# Altium PCB OMD_60V_REF_BK.PcbDoc (part 2 of 2)
Units mm, origin at the board's own origin, x right, y up, seen from the top; angles counter-clockwise.
Board outline 72 x 71.99 mm, 6 copper layers (Top Layer, L2, L3, L4, L5, Bottom Layer), stack 1.563 mm thick; 142 components, 145 nets, 791 pads, 505 vias.
Unrouted connection lines stored in the file: 199.
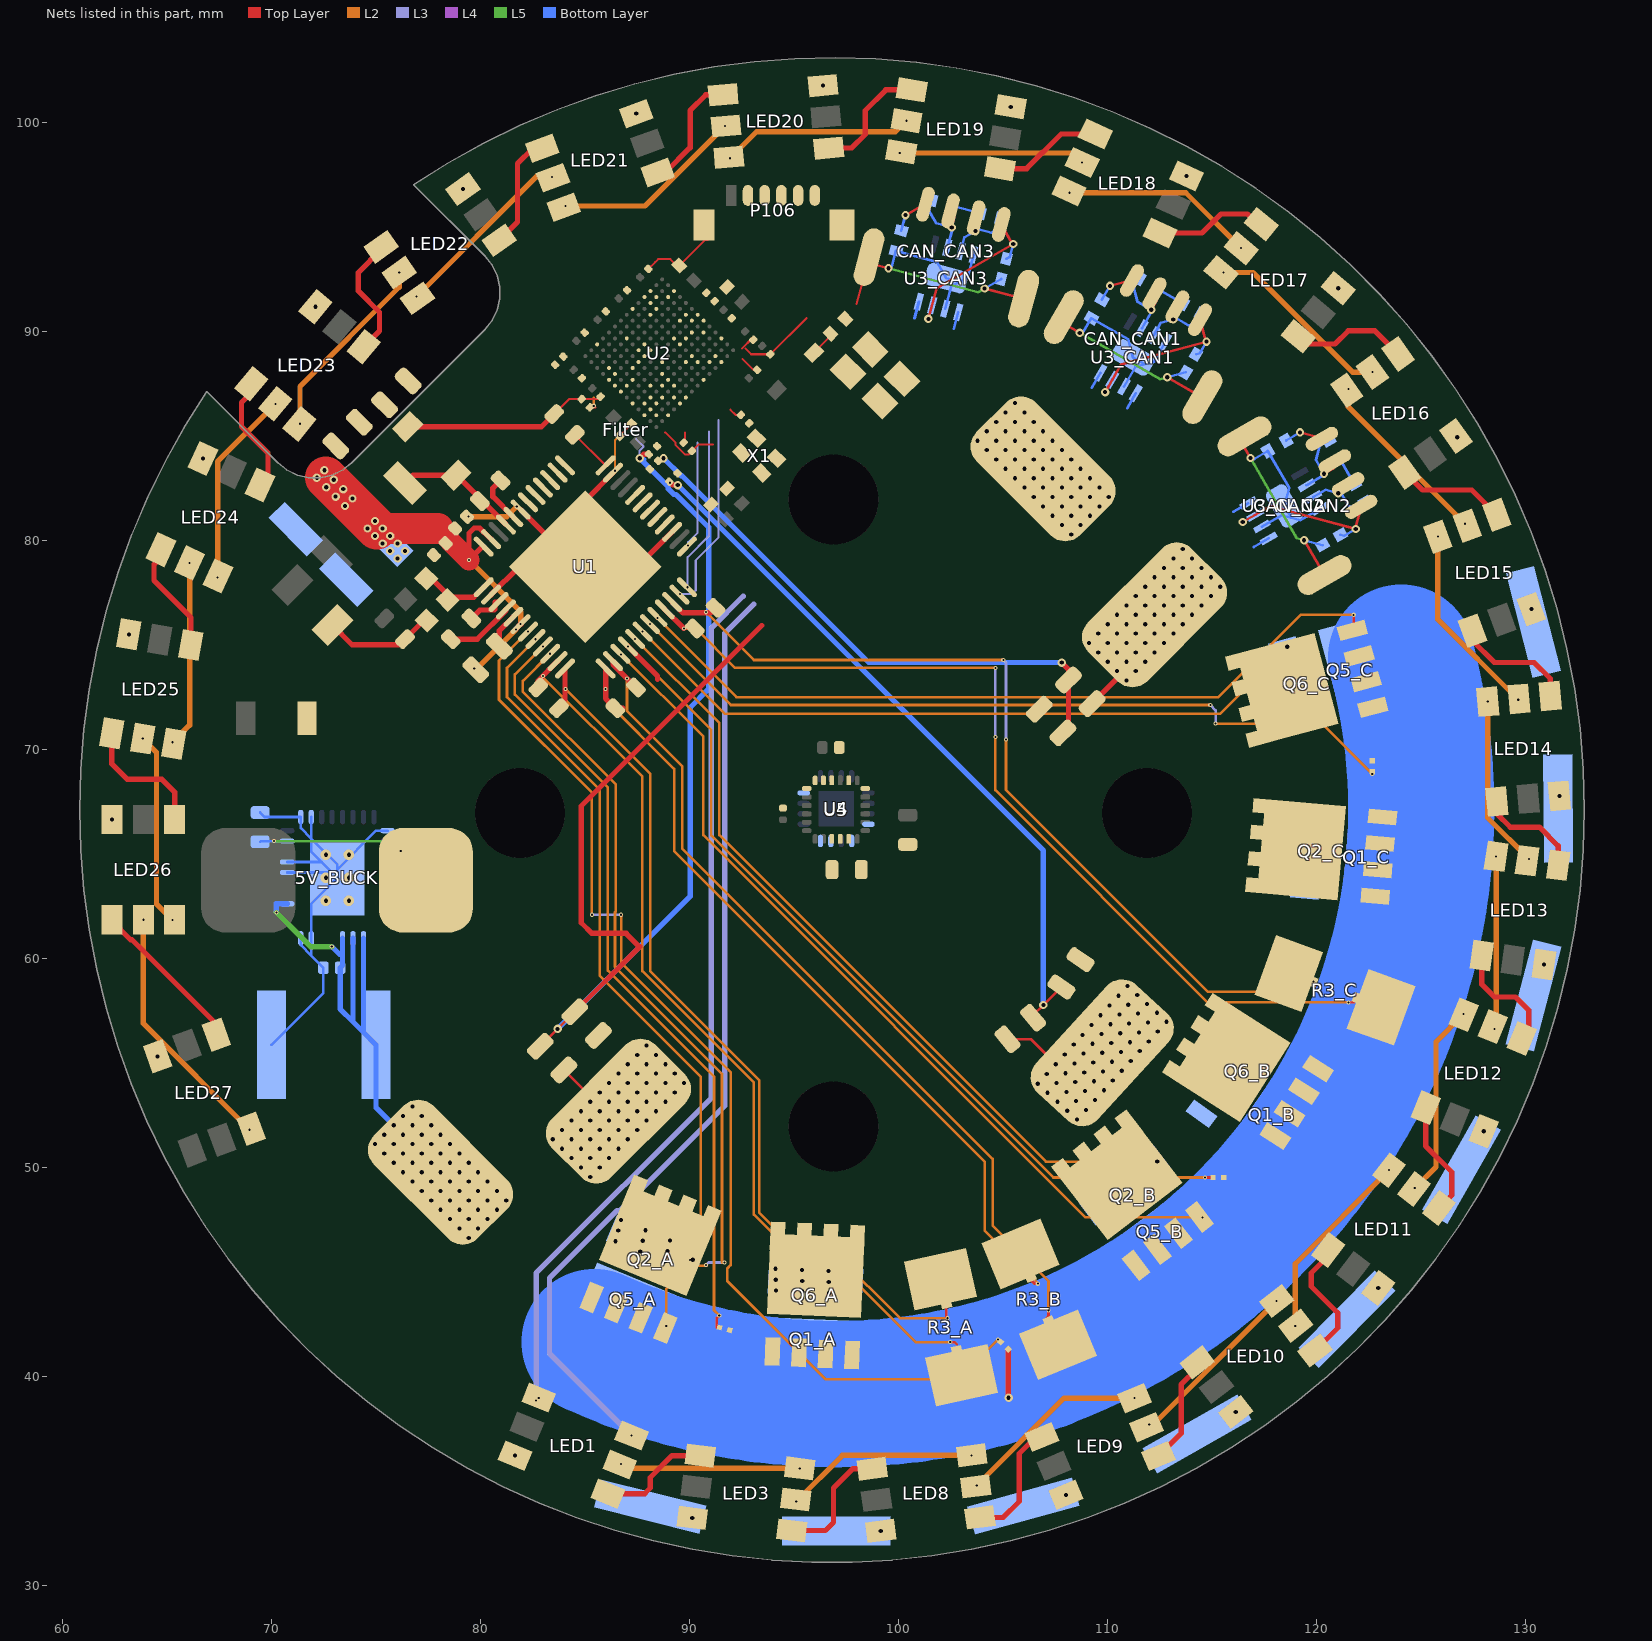
[diagram p6: the nets of this part, all layers, seen from the top]

## Via types
v1: diameter 0.4, hole 0.2, Top Layer to Bottom Layer, 379 vias
v2: diameter 0.2, hole 0.1, Top Layer to L2, 86 vias
v3: diameter 0.2, hole 0.1, L2 to L3, 15 vias
v4: diameter 0.2, hole 0.1, L5 to Bottom Layer, 9 vias
v5: diameter 0.5, hole 0.2, Top Layer to Bottom Layer, 6 vias
v6: diameter 0.2, hole 0.1, Top Layer to L3, 4 vias
v7: diameter 0.2, hole 0.1, L4 to L5, 3 vias
v8: diameter 0.4, hole 0.2, L3 to L4, 3 vias

## Nets (pads, with @x,y where several pads share a name; then routed paths per layer and width w, separated by ;. In a path a pad name is that pad's centre, name@x,y a point inside that pad or via, vN(x,y) a via of type N, cw(c..) or ccw(c..) an arc to the next point about the centre after c; other vN are vias at no path point) (continued)
GND: 5V_BUCK.6 5V_BUCK.7 5V_BUCK.11 5V_BUCK.12 5V_BUCK.19 5V_BUCK.35 5V_BUCK.36 5V_BUCK.37 -.1 C3.2 C5.2 C6.2 C7.P$2 C8.2 C11.1 C12.2 C13.P$2 C14.1 C15.2 C16_CAN1.1 C16_CAN2.1 C16_CAN3.1 C17.2 C18.P$2 C19.2 C20.1 C21.1 C22.1 C23.1 C24.1 C25.1 C26.2 C27.2 C28.2 C29.1 C30.1 C31.1 C32.2 C33.2 C34.2 C35.2 C36.2 C37.2 C38.2 C39.2 C40.1 C41.1 C42.1 C43.2 C44.2 C45_A.2 C45_B.2 C45_C.2 C46.1 C47.1 C48.P$2 CAN_CAN1.GND CAN_CAN2.GND CAN_CAN3.GND D1.2 Filter.2 LED1.4 LED3.4 LED8.4 LED9.4 LED10.4 LED11.4 LED12.4 LED13.4 LED14.4 LED15.4 LED16.4 LED17.4 LED18.4 LED19.4 LED20.4 LED21.4 LED22.4 LED23.4 LED24.4 LED25.4 LED26.4 LED27.4 P106.6 P106.GND R1_CAN1.2 R1_CAN2.2 R1_CAN3.2 R3_A.2 R3_B.2 R3_C.2 R7.1 R10_A.2 R10_B.2 R10_C.2 R18.2 R19.1 U1.2 U1.27 U1.35 U1.43 U1.49 U2.A8 U2.A11 U2.B6 U2.C2 U2.F1 U2.F13 U2.H5 U2.J9 U2.J13 U2.M1 U2.M11 U2.N4 U2.N5 U2.P9 U3_CAN1.2 U3_CAN1.8 U3_CAN2.2 U3_CAN2.8 U3_CAN3.2 U3_CAN3.8 U4.8 U5.11 U5.18 U5.20 X1.2 X1.4 | length 129.1
  Top Layer w0.1: C8.2@83.54,86.06 84.259,86.779 C43.2@84.853,86.779 C32.2@85.645,86.779 ; U1.35@86.356,83.253 v2(86.448,83.346) ; v2(86.674,85.028) Filter.2@87.239,85.594 ; C37.2@88.043,93.002 88.368,93.327 88.513,93.472 89.101,93.472 89.524,93.049 C14.1@89.524,93.158 90.767,94.401 P106.GND@90.871,94.401 ; 88.85,85.18 89.351,84.679 89.351,84.57 89.806,84.115 89.967,84.115 90.459,84.607 91.144,84.607 ; 91.968,86.269 92.219,86.017 C39.2@92.473,86.017 ; 92.533,89.203 C26.2@93.006,89.676 ; 92.558,88.689 93.071,88.176 C28.2@93.25,88.176 ; 92.686,89.203 92.966,88.923 C27.2@93.885,88.923 95.619,90.656 ; 98.014,91.319 CAN_CAN3.GND@98.272,92.282
  Top Layer w0.127: CAN_CAN3.GND@98.602,93.565 98.791,93.237 v1(99.538,93.036) ; v1(104.135,92.068) 105.984,91.572 CAN_CAN3.GND@106.001,91.582 ; CAN_CAN1.GND@107.92,90.698 108.018,90.332 v1(108.688,89.945) ; v1(112.877,87.82) 114.535,86.863 CAN_CAN1.GND@114.554,86.868 ; CAN_CAN2.GND@116.566,84.993 116.468,84.627 v1(116.854,83.957) ; v1(119.42,80.022) 120.377,78.364 CAN_CAN2.GND@120.396,78.359
  Top Layer w0.254: C5.2@72.925,75.974 73.875,75.024 76.135,75.024 77.418,76.307 R7.1@77.571,76.307 ; D1.2@76.528,85.453 82.933,85.453 C8.2@83.54,86.06 ; C7.P$2@79.365,81.149 v2(79.435,81.149) ; U1.2@80.522,77.42 81.848,78.745 U1.49@84.676,78.745 ; U1.43@81.936,81.485 U1.49@84.676,78.745 ; U1.35@86.356,83.253 85.03,81.927 U1.49@85.03,78.745 ; U1.27@89.184,80.425 87.505,78.745 U1.49@85.03,78.745 ; v1(108.031,34.336) LED9.4@108.031,34.349 ; LED16.4@126.686,85.012 v1(126.746,84.953) ; U1.49@84.676,78.745 U1.49@85.03,78.745
  L5 w0.127: v1(99.538,93.036) 103.824,91.888 v1(104.135,92.068) ; v1(108.688,89.945) 112.53,87.727 v1(112.877,87.82) ; v1(116.854,83.957) 119.073,80.115 v1(119.42,80.022)
  L2 w0.1: v2(86.448,83.346) 86.448,84.803 v2(86.674,85.028)
  L2 w0.254: v2(79.435,81.149) 81.27,81.149 v2(81.749,81.628)
  Bottom Layer w0.127: C47.1@69.469,66.994 69.686,66.777 5V_BUCK.11@71.415,66.777 71.415,66.253 71.915,65.753 ; C46.1@70.017,55.88 72.498,58.361 C48.P$2@72.498,59.563 71.915,60.146 ; 5V_BUCK.6@70.765,64.127 72.915,64.127 5V_BUCK.37@72.415,64.627 ; 5V_BUCK.7@70.765,64.627 5V_BUCK.37@72.415,64.627 ; 5V_BUCK.36@71.415,60.977 71.415,60.646 71.915,60.146 ; 5V_BUCK.12@71.915,66.777 71.915,65.753 ; 5V_BUCK.19@75.565,66.127 75.017,66.127 5V_BUCK.37@73.165,64.275 ; v1(99.538,93.036) 99.694,93.126 R1_CAN3.2@99.891,93.862 101.854,93.336 U3_CAN3.2@102.303,92.559 U3_CAN3.2@102.931,92.39 ; U3_CAN3.2@102.249,91.103 102.533,92.161 U3_CAN3.2@102.931,92.39 ; U3_CAN3.8@103.612,93.678 103.329,92.62 U3_CAN3.2@102.931,92.39 ; v1(104.135,92.068) C16_CAN3.1@104.923,92.522 ; v1(108.688,89.945) 108.861,89.992 R1_CAN1.2@109.242,90.652 111.002,89.636 U3_CAN1.2@111.234,88.768 U3_CAN1.2@111.797,88.443 ; U3_CAN1.2@110.806,87.376 111.353,88.324 U3_CAN1.2@111.797,88.443 ; U3_CAN1.8@112.789,89.511 112.241,88.562 U3_CAN1.2@111.797,88.443 ; v1(112.877,87.82) C16_CAN1.1@113.756,88.055 ; v1(116.854,83.957) 117.028,83.911 R1_CAN2.2@117.688,84.292 118.704,82.532 U3_CAN2.2@118.471,81.665 U3_CAN2.2@118.796,81.102 ; U3_CAN2.2@117.404,80.673 118.352,81.221 U3_CAN2.2@118.796,81.102 ; v1(119.42,80.022) C16_CAN2.1@120.298,79.786 ; U3_CAN2.8@120.189,81.53 119.24,80.983 U3_CAN2.2@118.796,81.102 ; 71.915,60.146 5V_BUCK.35@71.915,60.977 71.915,62.627 5V_BUCK.37@73.165,63.877 5V_BUCK.37@73.165,64.275 ; 71.915,65.753 73.165,64.503 5V_BUCK.37@73.165,64.275 ; 71.915,65.753 71.915,65.127 5V_BUCK.37@72.415,64.627
  Bottom Layer w0.254: v1(108.031,34.336) C21.1@108.077,34.29
  other v1: 99.162,32.62 90.148,33.245 81.666,36.224 116.15,38.315 122.966,44.247 128.014,51.741 64.564,55.327 130.893,59.721 62.381,66.662 131.636,67.792 63.19,75.517 130.295,76.728 108.281,80.296 107.832,80.745 108.73,80.745 107.383,81.194 108.281,81.194 109.179,81.194 106.934,81.643 107.832,81.643 108.73,81.643 109.628,81.643 106.485,82.092 107.383,82.092 108.281,82.092 109.179,82.092 110.077,82.092 106.036,82.541 106.934,82.541 107.832,82.541 108.73,82.541 109.628,82.541 105.587,82.99 106.485,82.99 107.383,82.99 108.281,82.99 109.179,82.99 105.138,83.439 106.036,83.439 107.832,83.439 108.73,83.439 104.689,83.888 105.587,83.888 106.485,83.888 107.383,83.888 108.281,83.888 66.744,83.929 104.24,84.337 105.138,84.337 106.036,84.337 106.934,84.337 107.832,84.337 103.791,84.786 104.689,84.786 105.587,84.786 106.485,84.786 107.383,84.786 104.24,85.235 105.138,85.235 106.036,85.235 106.934,85.235 104.689,85.684 105.587,85.684 106.485,85.684 105.138,86.133 106.036,86.133 105.587,86.582 72.115,91.196 121.057,92.08 79.183,96.825 113.79,97.451 87.467,100.434 105.381,100.757 96.403,101.775
  other v5: 72.615,62.777 73.715,62.777 72.615,63.877 73.715,63.877 72.615,64.977 73.715,64.977
I_A: U1.25 U2.M13 | length 5.2
  Top Layer w0.1: U1.25@89.891,79.718 v6(89.952,79.778)
  L3 w0.1: v6(89.952,79.778) 89.952,79.927 90.401,80.376 90.401,84.686
I_B: U1.24 U2.J11 | length 7.9
  Top Layer w0.1: U1.24@89.891,77.773 v6(89.922,77.773)
  L3 w0.1: v6(89.922,77.773) 89.922,79.21 90.94,80.227 90.94,85.219
I_C: U1.23 U2.J10 | length 9.5
  Top Layer w0.1: U1.23@89.538,77.42 v6(89.562,77.444)
  L3 w0.1: v6(89.562,77.444) 90.132,77.444 90.311,77.623 90.311,79.06 91.398,80.147 91.398,85.779
MCU_BATT_IN: 5V_BUCK.3 5V_BUCK.30 5V_BUCK.31 5V_BUCK.32 +.1 C6.1 C7.P$1 C10.2 C12.1 C13.P$1 C20.2 C21.2 C22.2 C23.2 C24.2 C25.2 C29.2 C30.2 C31.2 C46.2 C48.P$1 NT1.2 Q1_A.D Q1_B.D Q1_C.D Q5_A.D Q5_B.D Q5_C.D R16.2 U1.6 U1.47 U1.48 | length 110.1
  Top Layer w0.127: 72.432,83.008 73.027,82.413
  Top Layer w0.254: v1@72.351,83.025 72.605,83.025 ; C13.P$1@78.574,79.966 C13.P$1@78.574,79.977 ; U1.48@80.169,79.718 80.104,79.718 v2(79.463,79.077) 79.463,80.358 79.717,80.612 79.971,80.612 80.512,80.071 U1.47@80.522,80.071 ; v2(81.717,75.754) 81.717,75.786 v2(81.936,76.005) ; NT1.2@105.271,41.307 105.271,39.001 v1(105.283,38.989)
  Top Layer w1: 77.968,80.583 C13.P$1@78.574,79.977 ; C13.P$1@78.574,79.966 v2(79.463,79.077)
  Top Layer w1.5: 75.047,80.583 77.968,80.583
  Top Layer w2: 72.605,83.025 75.047,80.583
  L5 w0.254: v4(70.247,62.214) 71.882,60.579 v4(72.898,60.579)
  L2 w0.254: v2@79.463,79.088 81.936,76.615 v2(81.936,76.005) ; v2(79.717,73.881) 79.844,73.881 v2(81.717,75.754)
  Bottom Layer w0.254: v4(70.247,62.214) 70.247,62.627 5V_BUCK.3@70.765,62.627 ; v4(72.898,60.579) 73.279,60.198 73.415,60.198 ; 5V_BUCK.32@73.415,60.977 73.415,60.198 ; 5V_BUCK.31@73.915,60.977 73.915,56.982 ; 5V_BUCK.30@74.415,60.977 C46.2@74.415,56.482 ; v1(76.309,51.58) 75.017,52.872 C46.2@75.017,55.88 C46.2@74.415,56.482 ; 73.415,60.198 73.415,59.68 C48.P$1@73.298,59.563 73.298,57.599 73.915,56.982 ; 73.915,56.982 C46.2@74.415,56.482
  Bottom Layer w7: Q5_A.D@85.472,41.663 ccw(c97.028,67.167) Q5_C.D@124.074,74.414
  other v1: 79.452,46.641 79.003,47.09 79.901,47.09 78.554,47.539 79.452,47.539 80.35,47.539 78.105,47.988 79.003,47.988 79.901,47.988 80.799,47.988 77.656,48.437 78.554,48.437 79.452,48.437 80.35,48.437 81.248,48.437 77.207,48.886 78.105,48.886 79.003,48.886 79.901,48.886 80.799,48.886 76.758,49.335 77.656,49.335 78.554,49.335 79.452,49.335 80.35,49.335 76.309,49.784 77.207,49.784 79.003,49.784 79.901,49.784 75.86,50.233 76.758,50.233 77.656,50.233 78.554,50.233 79.452,50.233 75.411,50.682 76.309,50.682 77.207,50.682 78.105,50.682 79.003,50.682 74.962,51.131 75.86,51.131 76.758,51.131 77.656,51.131 78.554,51.131 75.411,51.58 77.207,51.58 78.105,51.58 75.86,52.029 76.758,52.029 77.656,52.029 76.309,52.478 77.207,52.478 76.758,52.927 76.047,79.147 75.688,79.506 76.407,79.506 75.329,79.865 76.047,79.865 74.97,80.224 75.688,80.224 74.611,80.583 75.329,80.583 74.97,80.943 73.533,81.661 73.892,82.02 73.084,82.11 73.443,82.469 72.635,82.559 72.994,82.918 72.186,83.008 72.545,83.367
Net5V_BUCK_9: 5V_BUCK.9 5V_BUCK.21 C47.2 | length 8.2
  L5 w0.127: v4(70.133,65.627) 75.724,65.627 v4(76.2,65.151)
  Bottom Layer w0.127: C47.2@69.469,65.594 69.502,65.627 v4(70.133,65.627) 5V_BUCK.9@70.765,65.627 ; 5V_BUCK.21@75.565,65.127 76.176,65.127 v4(76.2,65.151)
Net5V_BUCK_24: 5V_BUCK.24 5V_BUCK.25 5V_BUCK.26 C2.P$2 L2.1 | length 3.2
  Bottom Layer w0.127: 5V_BUCK.26@75.565,62.627 76.324,62.627 C2.P$2@76.581,62.884 76.338,63.127 ; 5V_BUCK.25@75.565,63.127 76.338,63.127 ; 5V_BUCK.24@75.565,63.627 75.838,63.627 76.338,63.127
Net5V_BUCK_27: 5V_BUCK.27 C2.P$1 | length 1
  Bottom Layer w0.127: 5V_BUCK.27@75.565,62.127 76.538,62.127 C2.P$1@76.581,62.084
NetA_1: A.1 NT2_A.2 Q1_A.S Q2_A.D Q5_A.S Q6_A.D R9_A.2 | length 2
  Top Layer w0.127: R9_A.2@84.005,54.679 85.267,53.417 v1(85.267,53.154)
  other v1: 96.684,44.007 95.415,44.063 94.147,44.118 96.675,44.531 95.406,44.586 94.138,44.642 96.666,45.054 95.398,45.11 94.129,45.165 88.828,45.509 87.654,45.995 88.955,46.017 86.481,46.481 87.781,46.503 89.082,46.525 86.608,46.989 87.908,47.011 86.735,47.497 85.267,49.562 84.818,50.011 85.716,50.011 84.369,50.46 85.267,50.46 86.165,50.46 83.92,50.909 84.818,50.909 85.716,50.909 86.614,50.909 83.471,51.358 84.369,51.358 85.267,51.358 86.165,51.358 87.063,51.358 83.92,51.807 84.818,51.807 85.716,51.807 86.614,51.807 87.512,51.807 84.369,52.256 85.267,52.256 86.165,52.256 87.063,52.256 87.961,52.256 84.818,52.705 85.716,52.705 87.512,52.705 88.41,52.705 86.165,53.154 87.063,53.154 87.961,53.154 88.859,53.154 85.716,53.603 86.614,53.603 87.512,53.603 88.41,53.603 89.308,53.603 86.165,54.052 87.063,54.052 87.961,54.052 88.859,54.052 89.757,54.052 86.614,54.501 87.512,54.501 88.41,54.501 89.308,54.501 87.063,54.95 87.961,54.95 88.859,54.95 87.512,55.399 88.41,55.399 87.961,55.848
NetB_1: B.1 NT2_B.2 Q1_B.S Q2_B.D Q5_B.S Q6_B.D R9_B.2 | length 2.8
  Top Layer w0.127: R9_B.2@105.232,56.146 106.345,56.146 v1(107.539,54.952)
  other v1: 108.554,52.299 108.085,52.728 108.983,52.768 107.617,53.157 108.514,53.197 109.412,53.236 107.149,53.586 108.046,53.626 108.943,53.665 109.841,53.704 106.681,54.015 107.578,54.055 108.475,54.094 109.372,54.133 110.27,54.172 107.11,54.484 108.007,54.523 108.904,54.562 109.801,54.601 110.699,54.64 108.436,54.991 109.333,55.03 110.23,55.069 111.128,55.108 107.968,55.42 108.865,55.459 110.659,55.537 111.557,55.577 108.397,55.888 109.294,55.927 110.191,55.966 111.088,56.006 111.986,56.045 108.826,56.356 109.723,56.395 110.62,56.435 111.517,56.474 112.415,56.513 109.255,56.824 110.152,56.864 111.049,56.903 111.946,56.942 112.844,56.981 109.684,57.293 110.581,57.332 111.478,57.371 112.375,57.41 110.113,57.761 111.01,57.8 111.907,57.839 110.542,58.229 111.439,58.268 110.971,58.697
NetC1_A_1: C1_A.1 R3_A.S1 U1.11 | length 44.5
  Top Layer w0.127: C1_A.1@82.778,72.979 83,73.2 v2(83,73.533) ; v2(102.489,41.656) 102.695,41.656 102.804,41.547
  Top Layer w0.254: C1_A.1@82.778,72.979 82.778,73.312 U1.11@83.704,74.238
  L2 w0.127: v2(83,73.533) 83,73.464 87.757,68.707 87.757,59.414 93.091,54.08 93.091,47.752 95.25,45.593 96.901,45.593 100.838,41.656 v2(102.489,41.656)
NetC1_A_2: C1_A.2 R3_A.S2 U1.12 | length 42.2
  Top Layer w0.127: R3_A.S2@102.296,43.522 102.296,42.865 v2(102.362,42.799)
  Top Layer w0.254: 84.058,72.39 U1.12@84.058,73.884
  L2 w0.127: v2(84.074,72.898) 88.138,68.834 88.138,59.392 93.345,54.185 93.345,47.857 95.355,45.847 97.028,45.847 100.076,42.799 v2(102.362,42.799)
NetC1_B_1: C1_B.1 R3_B.S1 U1.14 | length 40.7
  Top Layer w0.127: R3_B.S1@107.109,42.829 107.188,42.907 v2(107.188,43.18)
  Top Layer w0.254: U1.14@86.356,74.238 86.356,74.075 v2(87.024,73.406) C1_B.1@87.451,72.979 C1_B.1@87.477,72.979
  L2 w0.127: v2(87.024,73.406) 87.024,71.853 89.662,69.215 89.662,65.278 104.521,50.419 104.521,47.244 107.188,44.577 v2(107.188,43.18)
NetC1_B_2: C1_B.2 R3_B.S2 U1.13 | length 39.8
  Top Layer w0.127: R3_B.S2@106.387,44.572 106.509,44.45 v2(106.68,44.45)
  Top Layer w0.254: U1.13@86.002,73.884 v2(86.002,72.898) 86.002,72.448 C1_B.2@86.461,71.989 C1_B.2@86.816,71.989
  L2 w0.127: v2(86.002,72.898) 86.002,72.367 89.281,69.088 89.281,65.151 104.14,50.292 104.14,46.99 v2(106.68,44.45)
NetC1_C_1: C1_C.1 R3_C.S1 U1.21 | length 44.5
  Top Layer w0.127: v2(121.539,57.912) 121.82,57.912 R3_C.S1@122.009,58.101
  Top Layer w0.254: U1.21@88.831,76.712 v2(89.744,75.799)
  L2 w0.127: v2(89.744,75.799) 90.317,75.799 92.202,73.914 v3(104.648,73.914) ; v3(104.648,70.612) 104.648,68.072 114.808,57.912 v2(121.539,57.912)
  L3 w0.127: v3(104.648,70.612) v3(104.648,73.914)
NetC1_C_2: C1_C.2 R3_C.S2 U1.22 | length 42.8
  Top Layer w0.127: R3_C.S2@119.801,58.905 v2(119.865,58.905)
  Top Layer w0.254: U1.22@89.184,77.066 89.702,76.548 91.02,76.548 C1_C.2@91.261,76.789
  L2 w0.127: v2(90.805,76.581) 93.091,74.295 v3(105.029,74.295) ; v3(105.156,70.485) 105.156,68.072 114.808,58.42 119.38,58.42 v2(119.865,58.905)
  L3 w0.127: v3(105.029,74.295) 105.156,74.168 v3(105.156,70.485)
NetC4_1: C4.1 D1.1 L1.2 U1.45 | length 6
  Top Layer w0.254: L1.2@76.405,82.761 76.782,83.137 D1.1@78.843,83.137 78.87,83.137 U1.45@81.229,80.778
NetC4_2: C4.2 U1.44 | length 2.3
  Top Layer w0.254: C4.2@80.974,82.885 80.606,82.517 80.606,82.108 U1.44@81.583,81.132
NetC8_1: C8.1 U1.36 | length 2.1
  Top Layer w0.1: C8.1@84.53,85.07 85.994,83.607 U1.36@86.002,83.607 U1.36@86.035,83.64
NetC9_1: C9.1 U1.3 | length 1.8
  Top Layer w0.254: C9.1@79.577,76.281 79.983,76.687 80.668,76.687 80.705,76.724 80.705,77.063 80.707,77.066 U1.3@80.876,77.066
NetC9_2: C9.2 U1.4 | length 3.3
  Top Layer w0.254: C9.2@78.587,75.291 79.857,75.291 81.229,76.663 U1.4@81.229,76.712
NetC10_1: C10.1 U1.5 | length 1.7
  Top Layer w0.254: C10.1@80.918,74.955 80.918,75.694 U1.5@81.583,76.359
NetC16_CAN1_2: C16_CAN1.2 CAN_CAN1.1 U3_CAN1.3 | length 8.4
  Top Layer w0.127: v1(109.901,87.11) 110.663,88.429 v1(114.751,89.525) 114.715,89.545 CAN_CAN1.1@114.44,90.571
  Bottom Layer w0.127: v1(109.901,87.11) U3_CAN1.3@110.243,87.701 ; C16_CAN1.2@114.256,88.921 114.429,88.968 v1(114.751,89.525)
NetC16_CAN2_2: C16_CAN2.2 CAN_CAN2.1 U3_CAN2.3 | length 8.4
  Top Layer w0.127: v1(116.488,80.895) 117.807,81.657 v1(121.895,80.561) 121.874,80.597 CAN_CAN2.1@122.149,81.623
  Bottom Layer w0.127: v1(116.488,80.895) U3_CAN2.3@117.079,81.236 ; C16_CAN2.2@121.164,80.286 121.338,80.24 v1(121.895,80.561)
NetC16_CAN3_2: C16_CAN3.2 CAN_CAN3.1 U3_CAN3.3 | length 8.4
  Top Layer w0.127: v1(101.445,90.611) 101.839,92.083 v1(105.503,94.199) 105.464,94.21 CAN_CAN3.1@104.933,95.13
  Bottom Layer w0.127: v1(101.445,90.611) U3_CAN3.3@101.621,91.271 ; C16_CAN3.2@105.181,93.488 105.337,93.578 v1(105.503,94.199)
NetC17_1: C17.1 U5.10
NetC39_1: C39.1 U2.K12 X1.3
NetC40_2: C40.2 U2.K13 X1.1 | length 0.4
  Top Layer w0.1: C40.2@89.806,84.747 89.806,85.179
NetC43_1: C43.1 U2.P5 | length 0.7
  Top Layer w0.1: C43.1@85.249,86.383 85.503,86.383 v2(85.432,86.454)
  L2 w0.1: v2(85.432,86.454) 85.432,86.844
NetC44_1: C44.1 U2.C1
NetC_1: C.1 NT2_C.2 Q1_C.S Q2_C.D Q5_C.S Q6_C.D R9_C.2 | length 2
  Top Layer w0.254: R9_C.2@109.278,72.205 110.472,73.4 v1(110.472,73.76)
  other v1: 110.921,73.311 111.37,73.76 110.023,74.209 110.921,74.209 111.819,74.209 109.574,74.658 110.472,74.658 111.37,74.658 112.268,74.658 109.125,75.107 110.023,75.107 110.921,75.107 111.819,75.107 112.717,75.107 109.574,75.556 110.472,75.556 111.37,75.556 112.268,75.556 113.166,75.556 110.023,76.005 110.921,76.005 111.819,76.005 112.717,76.005 113.615,76.005 110.472,76.454 111.37,76.454 113.166,76.454 114.064,76.454 110.921,76.903 111.819,76.903 112.717,76.903 113.615,76.903 114.513,76.903 111.37,77.352 112.268,77.352 113.166,77.352 114.064,77.352 114.962,77.352 111.819,77.801 112.717,77.801 113.615,77.801 114.513,77.801 115.411,77.801 112.268,78.25 113.166,78.25 114.064,78.25 114.962,78.25 112.717,78.699 113.615,78.699 114.513,78.699 113.166,79.148 114.064,79.148 113.615,79.597
NetCAN_CAN1_2: CAN_CAN1.2 R15_CAN1.2 U3_CAN1.7 | length 3
  Bottom Layer w0.127: U3_CAN1.7@112.226,89.836 112.567,90.427 v1(113.164,90.587) 113.338,90.634 113.888,90.316 114.235,90.409 R15_CAN1.2@114.489,90.849
NetCAN_CAN1_3: CAN_CAN1.3 JMP_CAN1.1 U3_CAN1.6 | length 3.9
  Top Layer w0.127: v1(112.111,91.049) 112.36,91.479 CAN_CAN1.3@112.267,91.826
  Bottom Layer w0.127: JMP_CAN1.1@111.526,92.559 111.268,92.113 111.451,91.43 v1(112.111,91.049) 112.131,90.972 U3_CAN1.6@111.663,90.161
NetCAN_CAN1_4: CAN_CAN1.4 R1_CAN1.1 | length 1.9
  Top Layer w0.127: v1(110.131,92.192) 111.157,92.466 CAN_CAN1.4@111.189,92.448
  Bottom Layer w0.127: R1_CAN1.1@109.746,91.525 v1(110.131,92.192)
NetCAN_CAN2_2: CAN_CAN2.2 R15_CAN2.2 U3_CAN2.7 | length 3
  Bottom Layer w0.127: U3_CAN2.7@119.864,82.093 120.455,82.435 v1(121.052,82.275) 121.226,82.228 121.543,81.678 121.89,81.585 R15_CAN2.2@122.33,81.839
NetCAN_CAN2_3: CAN_CAN2.3 JMP_CAN2.1 U3_CAN2.6 | length 3.9
  Top Layer w0.127: v1(120.371,83.201) 120.801,83.45 CAN_CAN2.3@120.894,83.796
  Bottom Layer w0.127: U3_CAN2.6@119.539,82.656 120.35,83.125 v1(120.371,83.201) 119.99,83.861 120.173,84.544 JMP_CAN2.1@120.619,84.802
NetCAN_CAN2_4: CAN_CAN2.4 R1_CAN2.1 | length 1.9
  Top Layer w0.127: v1(119.228,85.181) 120.253,84.906 CAN_CAN2.4@120.272,84.874
  Bottom Layer w0.127: R1_CAN2.1@118.561,84.796 v1(119.228,85.181)
NetCAN_CAN3_2: CAN_CAN3.2 R15_CAN3.2 U3_CAN3.7 | length 3
  Bottom Layer w0.127: U3_CAN3.7@102.984,93.846 103.161,94.506 v1(103.696,94.815) 103.852,94.905 104.465,94.74 104.776,94.92 R15_CAN3.2@104.908,95.411
NetCAN_CAN3_3: CAN_CAN3.3 JMP_CAN3.1 U3_CAN3.6 | length 3.9
  Top Layer w0.127: CAN_CAN3.3@102.508,95.779 102.688,95.468 v1(102.559,94.988)
  Bottom Layer w0.127: JMP_CAN3.1@101.603,96.296 101.47,95.798 101.823,95.185 v1(102.559,94.988) 102.599,94.919 U3_CAN3.6@102.356,94.014
NetCAN_CAN3_4: CAN_CAN3.4 R1_CAN3.1 | length 1.9
  Top Layer w0.127: v1(100.351,95.58) 101.271,96.111 CAN_CAN3.4@101.306,96.101
  Bottom Layer w0.127: R1_CAN3.1@100.152,94.836 v1(100.351,95.58)
NetD2_C: D2.C R20.2 | length 1.2
  Top Layer w0.1: D2.C@95.968,88.989 96.757,89.778 R20.2@96.757,89.905
NetJMP_CAN1_2: JMP_CAN1.2 R15_CAN1.1 | length 1.4
  Bottom Layer w0.127: JMP_CAN1.2@112.399,92.055 R15_CAN1.1@113.616,91.353
NetJMP_CAN2_2: JMP_CAN2.2 R15_CAN2.1 | length 1.4
  Bottom Layer w0.127: JMP_CAN2.2@121.123,83.929 R15_CAN2.1@121.826,82.712
NetJMP_CAN3_2: JMP_CAN3.2 R15_CAN3.1 | length 1.4
  Bottom Layer w0.127: JMP_CAN3.2@102.577,96.035 R15_CAN3.1@103.934,95.671
NetLED1_1: LED1.1 LED3.6 | length 5.5
  Top Layer w0.254: LED1.1@86.108,34.406 87.873,34.406 88.138,34.671 88.138,35.179 89.18,36.221 LED3.6@90.527,36.221
NetLED1_2: LED1.2 LED3.3 | length 8.6
  L2 w0.254: v2(86.741,35.814) 86.941,35.614 v2(95.288,35.614)
NetLED3_1: LED3.1 LED8.6 | length 6
  Top Layer w0.254: LED3.1@94.909,32.638 96.519,32.638 96.901,33.02 96.901,34.671 97.822,35.592 LED8.6@98.758,35.592
NetLED3_2: LED3.2 LED8.3 | length 9.3
  L2 w0.254: v2(95.123,34.036) 97.326,36.239 v2(103.514,36.239)
NetLED8_1: LED8.1 LED9.6 | length 5.9
  Top Layer w0.254: LED8.1@103.918,33.267 105.022,33.267 105.791,34.036 105.791,36.322 106.585,37.116 LED9.6@106.871,37.116
NetLED8_2: LED8.2 LED9.3 | length 9.3
  L2 w0.254: v2(103.759,34.798) 107.933,38.972 v2(111.298,38.972)
NetLED9_1: LED9.1 LED10.6 | length 5.3
  Top Layer w0.254: LED9.1@112.458,36.205 113.538,37.286 113.538,39.624 114.313,40.399 LED10.6@114.313,40.687
NetLED9_2: LED9.2 LED10.3 | length 8.5
  L2 w0.254: v2(112.014,37.719) 112.202,37.719 v2(118.109,43.626)
NetLED10_1: LED10.1 LED11.6 | length 6.1
  Top Layer w0.254: LED10.1@119.945,41.254 121.031,42.339 121.031,43.053 119.761,44.323 119.761,44.958 120.578,45.775 LED11.6@120.578,46.063
NetLED10_2: LED10.2 LED11.3 | length 9.3
  L2 w0.254: v2(118.999,42.418) 118.999,45.4 v2(123.483,49.884)
NetLED11_1: LED11.1 LED12.6 | length 5.6
  Top Layer w0.254: LED12.6@125.237,52.878 125.237,51.039 126.492,49.784 126.492,48.689 LED11.1@125.871,48.068
NetLED11_2: LED11.2 LED12.3 | length 9.3
  Top Layer w0.254: LED12.3@127.055,57.32 v2(127.055,57.349)
  L2 w0.254: v2(124.714,49.022) 125.73,50.038 125.73,56.024 v2(127.055,57.349)
NetLED12_1: LED12.1 LED13.6 | length 5.6
  Top Layer w0.254: LED13.6@127.924,60.149 127.924,58.766 128.524,58.166 129.54,58.166 130.175,57.531 130.175,56.527 LED12.1@129.832,56.184
NetLED12_2: LED12.2 LED13.3 | length 8.3
  L2 w0.254: v2(128.524,56.642) 128.608,56.726 v2(128.608,64.9)
NetLED13_1: LED13.1 LED14.6 | length 5.1
  Top Layer w0.254: LED14.6@128.648,67.518 128.648,66.932 129.286,66.294 130.683,66.294 131.578,65.399 LED13.1@131.578,64.472
NetLED13_2: LED13.2 LED14.3 | length 8.3
  L2 w0.254: v2(128.209,72.298) 128.209,66.736 v2(130.175,64.77)
NetLED14_1: LED14.1 LED15.6 | length 5.8
  Top Layer w0.254: LED15.6@127.48,75.69 127.48,75.212 128.524,74.168 130.429,74.168 131.197,73.4 LED14.1@131.197,72.572
NetLED14_2: LED14.2 LED15.3 | length 9.4
  L2 w0.254: v2(125.819,80.193) 125.819,76.238 v2(129.667,72.39)
NetLED15_1: LED15.1 LED16.6 | length 5.2
  Top Layer w0.254: LED16.6@124.236,83.281 125.094,82.423 127.442,82.423 LED15.1@128.633,81.231
NetLED15_2: LED15.2 LED16.3 | length 8.9
  Top Layer w0.254: v2(127.127,80.811) LED15.2@127.226,80.712
  L2 w0.254: v2(121.539,87.249) 121.539,86.399 v2(127.127,80.811)
NetLED16_1: LED16.1 LED17.6 | length 5.6
  Top Layer w0.254: LED17.6@119.139,89.774 119.505,89.408 120.904,89.408 121.536,90.04 122.809,90.04 LED16.1@123.916,88.932
NetLED16_2: LED16.2 LED17.3 | length 9.1
  L2 w0.254: v2(115.57,92.837) 116.967,92.837 121.737,88.067 v2(122.691,88.067)
NetLED17_1: LED17.1 LED18.6 | length 5.4
  Top Layer w0.254: LED18.6@112.534,94.726 114.538,94.726 115.443,95.631 116.713,95.631 117.194,95.15 LED17.1@117.367,95.15
NetLED17_2: LED17.2 LED18.3 | length 9.3
  L2 w0.254: v2(108.204,96.647) 113.757,96.647 v2(116.408,93.997)
NetLED18_1: LED18.1 LED19.6 | length 5.2
  Top Layer w0.254: LED19.6@104.873,97.8 106.144,97.8 107.804,99.46 LED18.1@109.431,99.46
NetLED18_2: LED18.2 LED19.3 | length 8.9
  L2 w0.254: v2(100.076,98.552) 108.35,98.552 v2(108.803,98.098)
NetLED19_1: LED19.1 LED20.6 | length 5.8
  Top Layer w0.254: LED20.6@96.677,98.787 97.771,98.787 98.425,99.441 98.425,100.584 99.411,101.57 LED19.1@100.651,101.57
NetLED19_2: LED19.2 LED20.3 | length 9.2
  L2 w0.254: v2(91.948,98.298) 93.218,99.568 99.873,99.568 v2(100.397,100.092)
NetLED20_1: LED20.1 LED21.6 | length 5.7
  Top Layer w0.254: LED21.6@88.505,97.619 88.856,97.619 90.043,98.806 90.043,100.584 90.795,101.336 LED20.1@91.623,101.336
NetLED20_2: LED20.2 LED21.3 | length 9.3
  Top Layer w0.254: v2(91.714,99.842) LED20.2@91.76,99.842
  L2 w0.254: v2(84.074,96.012) 87.884,96.012 v2(91.714,99.842)
NetLED21_1: LED21.1 LED22.6 | length 5.5
  Top Layer w0.254: LED22.6@80.914,94.375 81.788,95.249 81.788,98.044 82.516,98.772 LED21.1@82.964,98.772
NetLED21_2: LED21.2 LED22.3 | length 8.9
  Top Layer w0.254: v2(83.439,97.409) LED21.2@83.483,97.365
  L2 w0.254: v2(76.962,91.694) 82.677,97.409 v2(83.439,97.409)
NetLED22_1: LED22.1 LED23.6 | length 6
  Top Layer w0.254: LED23.6@74.421,89.278 75.184,90.041 75.184,90.932 74.168,91.948 74.168,92.837 75.263,93.932 LED22.1@75.263,94.055
NetLED22_2: LED22.2 LED23.3 | length 9.2
  L2 w0.254: v2(71.374,85.598) 71.374,87.376 76.128,92.13 v2(76.128,92.83)
NetLED23_1: LED23.1 LED24.6 | length 5.7
  Top Layer w0.254: LED23.1@69.045,87.506 69.045,87.079 68.58,86.614 68.58,85.471 69.85,84.201 69.85,83.054 LED24.6@69.469,82.673
NetLED23_2: LED23.2 LED24.3 | length 9.5
  L2 w0.254: v2(67.437,78.232) 67.437,83.785 v2(70.198,86.547)
NetLED24_1: LED24.1 LED25.6 | length 5.4
  Top Layer w0.254: LED24.1@64.735,79.57 64.735,79.213 64.389,78.867 64.389,78.105 66.167,76.327 66.167,75.029 LED25.6@66.147,75.009
NetLED24_2: LED24.2 LED25.3 | length 8.9
  L2 w0.254: v2(65.278,70.358) 66.097,71.177 v2(66.097,78.942)
NetLED25_1: LED25.1 LED26.6 | length 6.3
  Top Layer w0.254: LED25.1@62.377,70.787 62.377,69.322 63.119,68.58 64.77,68.58 65.381,67.969 LED26.6@65.381,66.662
NetLED25_2: LED25.2 LED26.3 | length 9.4
  Top Layer w0.254: v2(65.278,61.849) LED26.3@65.405,61.849
  L2 w0.254: v2(63.855,70.533) 64.516,69.872 64.516,62.611 v2(65.278,61.849)
NetLED26_1: LED26.1 LED27.6 | length 7.6
  Top Layer w0.254: LED26.1@62.381,61.862 62.381,61.803 63.276,60.908 63.335,60.908 67.379,56.864 LED27.6@67.379,56.365
NetLED26_2: LED26.2 LED27.3 | length 12.3
  Top Layer w0.254: v2(68.961,51.816) LED27.3@69.088,51.816
  L2 w0.254: v2(63.881,61.862) 63.881,56.896 v2(68.961,51.816)
NetNT1_1: NT1.1 U1.7 | length 52.9
  Top Layer w0.127: v2(104.775,41.783) NT1.1@104.837,41.721
  L2 w0.127: v2(82.29,75.652) 80.899,74.261 80.899,72.39 85.344,67.945 v3(85.344,62.103) ; v3(86.741,62.103) 86.741,59.817 91.984,54.574 91.984,45.346 91.821,45.182 91.821,44.577 96.52,39.878 102.87,39.878 v2(104.775,41.783)
  L3 w0.127: v3(85.344,62.103) v3(86.741,62.103)
NetNT2_A_1: NT2_A.1 U1.9 | length 37.2
  Top Layer w0.127: NT2_A.1@91.324,42.356 91.324,42.81 v2(91.44,42.926)
  L2 w0.127: v2(82.997,74.945) 81.661,73.609 81.661,72.644 86.106,68.199 86.106,59.436 91.186,54.356 91.186,43.18 v2(91.44,42.926)
NetNT2_B_1: NT2_B.1 U1.16 | length 43.6
  Top Layer w0.127: v2(114.681,49.53) NT2_B.1@114.973,49.53
  Top Layer w0.254: v2(87.063,74.945) 88.48,73.527 88.48,73.373
  L2 w0.127: v2(87.063,74.945) 91.059,70.949 91.059,65.891 107.42,49.53 v2(114.681,49.53)
NetNT2_C_1: NT2_C.1 U1.19 | length 38
  Top Layer w0.127: v2(122.682,68.834) NT2_C.1@122.682,68.961
  L2 w0.127: v2(88.124,76.005) 91.993,72.136 v3(114.935,72.136) ; v3(115.189,71.247) 120.269,71.247 v2(122.682,68.834)
  L3 w0.127: v3(114.935,72.136) 115.189,71.882 v3(115.189,71.247)
NetQ1_A_G: Q1_A.G Q5_A.G U1.8 | length 34.4
  Top Layer w0.127: v2(82.643,75.283) U1.8@82.643,75.298
  L4 w0.127: v7(90.043,45.593) v3(90.17,45.593)
  L2 w0.127: v2(82.643,75.283) 81.28,73.92 81.28,72.517 85.725,68.072 85.725,59.182 90.551,54.356 90.551,45.974 v3(90.17,45.593)
  other v4: 90.043,45.593
  other v8: 90.17,45.593
NetQ1_B_G: Q1_B.G Q5_B.G U1.17 | length 38.5
  L2 w0.127: v2(87.416,75.298) 91.44,71.275 91.44,65.913 107.061,50.292 v3(112.395,50.292)
  other v4: 112.395,50.292
  other v7: 112.395,50.292
  other v8: 112.395,50.292
NetQ1_C_G: Q1_C.G Q5_C.G U1.18 | length 33.8
  L2 w0.127: v2(87.77,75.652) 91.694,71.728 115.416,71.728 v3(118.618,74.93)
  other v4: 118.618,74.93
  other v7: 118.618,74.93
  other v8: 118.618,74.93
NetQ2_A_G: Q2_A.G Q6_A.G U1.10 | length 39
  Top Layer w0.127: v2(83.349,74.591) U1.10@83.351,74.591
  L2 w0.127: v2(83.349,74.591) 82.042,73.285 82.042,72.771 86.487,68.326 86.487,62.26 86.451,62.223 86.451,59.599 91.567,54.483 91.567,45.466 v3(91.694,45.466) ; v2(88.9,42.418) 88.9,44.196 90.028,45.324 90.05,45.303 90.841,45.303 v3(90.805,45.339)
  L3 w0.127: v3(90.805,45.339) 90.932,45.466 v3(91.694,45.466)
NetQ2_A_S: Q2_A.S Q6_A.S R3_A.1
NetQ2_B_G: Q2_B.G Q6_B.G U1.15 | length 41.8
  Top Layer w0.127: U1.15@86.709,74.591 v2(86.741,74.559)
  L2 w0.127: v2(86.741,74.559) 90.678,70.622 90.678,65.913 108.966,47.625 v2(114.554,47.625)
NetQ2_B_S: Q2_B.S Q6_B.S R3_B.1
NetQ2_C_G: Q2_C.G Q6_C.G U1.20 | length 37.3
  Top Layer w0.127: v2(88.477,76.297) U1.20@88.477,76.359 ; Q6_C.G@121.733,75.711 121.793,75.771 v2(121.793,76.454)
  L2 w0.127: v2(88.477,76.297) 92.257,72.517 115.316,72.517 119.253,76.454 v2(121.793,76.454)
NetQ2_C_S: Q2_C.S Q6_C.S R3_C.1
NetR6_1: R6.1 R7.2 U1.1 | length 3.2
  Top Layer w0.254: R6.1@77.545,78.313 78.561,77.297 79.692,77.297 U1.1@80.169,77.773
NetR17_2: R17.2 U5.1
NetU2_D1: U2.D1 U3_CAN1.1 | length 0.8
  Bottom Layer w0.127: 110.956,86.337 U3_CAN1.1@111.369,87.051
NetU2_D8: U2.D8 U3_CAN3.1 | length 0.8
  Bottom Layer w0.127: 102.664,90.138 U3_CAN3.1@102.877,90.935
NetU2_E3: U2.E3 U3_CAN1.4 | length 0.8
  Bottom Layer w0.127: 109.268,87.312 U3_CAN1.4@109.68,88.026
NetU2_E8: U2.E8 U3_CAN3.4 | length 0.8
  Bottom Layer w0.127: 100.78,90.642 U3_CAN3.4@100.994,91.439
NetU2_H6: U2.H6 U2.J3
NetU2_H8: U2.H8 U3_CAN2.4 | length 0.8
  Bottom Layer w0.127: 116.04,81.386 U3_CAN2.4@116.754,81.799
NetU2_J5: U2.J5 U3_CAN2.1 | length 0.8
  Bottom Layer w0.127: 117.015,79.698 U3_CAN2.1@117.729,80.11
NetU2_K10: U2.K10
NetU2_N11: U2.N11
NetU2_N12: U2.N12
nFAULT: R2.2 U1.28 U2.M7
Phase_A_Volt_sense: C45_A.1 R9_A.1 R10_A.1 U2.L9 | length 61.3
  Top Layer w0.127: R9_A.1@82.873,55.811 v1(83.705,56.642) R10_A.1@84.524,57.462
  Top Layer w0.254: R10_A.1@84.524,57.462 87.63,60.567 86.983,61.214 85.344,61.214 84.836,61.722 84.836,67.31 93.472,75.946 ; v1(87.63,83.947) 87.813,84.13 C45_A.1@88.067,84.13
  L3 w0.1: 87.468,84.859 87.819,84.508 87.63,84.319 v1(87.63,83.947)
  Bottom Layer w0.254: v1(83.705,56.642) 90.043,62.98 90.043,72.009 90.932,72.898 90.932,80.645 89.37,82.207 89.267,82.207 89.001,82.473 89.001,82.576 87.757,83.82 87.819,83.882 87.755,83.947 v1(87.63,83.947)
Phase_B_Volt_sense: C45_B.1 R9_B.1 R10_B.1 U2.P11 | length 34.7
  Top Layer w0.127: R9_B.1@106.457,57.174 106.457,57.297 v1(106.945,57.785) R10_B.1@107.805,58.645
  Top Layer w0.254: C45_B.1@89.044,82.827 89.21,82.661 v1(89.455,82.661)
  L3 w0.1: v6(89.089,82.771) v6@89.15,82.832
  Bottom Layer w0.254: v1(89.455,82.661) 106.945,65.171 v1(106.945,57.785)
Phase_C_Volt_sense: C45_C.1 R9_C.1 R10_C.1 U2.N10 | length 26.8
  Top Layer w0.254: v1(107.823,74.168) 108.146,73.845 R9_C.1@108.146,73.337 108.146,71.074 R10_C.1@107.881,70.808
  L3 w0.1: v1@88.773,83.875 v1(88.773,83.947)
  Bottom Layer w0.254: v1(88.773,83.947) 89.605,83.115 89.643,83.115 98.59,74.168 v1(107.823,74.168)
PWM_A_H: U1.37 U2.P7
PWM_A_L: U1.38 U2.N7
PWM_B_H: U1.39 U2.K6
PWM_B_L: U1.40 U2.J6
PWM_C_H: U1.41 U2.P6
PWM_C_L: U1.42 U2.L6
R\S\T\: C38.1 U2.L11
SPI1_CS: U2.A7 U5.22
SPI1_MISO: U2.C6 U5.9
SPI1_MOSI: U2.E7 U5.24
SPI1_SCK: U2.B7 U5.23
SPI2_MOSI: LED1.3 U2.D3 | length 45.5
  L3 w0.254: v2(87.244,37.182) 83.312,41.115 83.312,44.716 86.547,47.951 86.686,47.951 91.694,52.959 91.694,75.565 93.091,76.962
  other v3: 87.244,37.182
SPI2_SCK: LED1.6 U2.B3 | length 42.8
  Top Layer w0.254: v2(82.802,38.987) LED1.6@82.802,39
  L2 w0.254: v3(82.677,38.862) v2(82.802,38.987)
  L3 w0.254: v3(82.677,38.862) 82.677,44.958 91.059,53.34 91.059,75.819 92.583,77.343
SPI4_CS: U1.32 U2.C12
SPI4_CS2: U2.F10 U4.5
SPI4_MISO: R8.2 U1.29 U2.D12 U4.7
SPI4_MOSI: U1.30 U2.E11 U4.4
SPI4_SCK: U1.31 U2.E10 U4.12
SWCLK: P106.5 U2.A3
SWDIO: P106.4 U2.D2
USART1_RX: P106.3 U2.C8
USART1_TX: P106.2 U2.B9
VBAT: C41.2 C42.2 R20.1 U2.C13
VSENSE: R16.1 R18.1 U2.M10
pads on no net: 5V_BUCK.8 5V_BUCK.13 5V_BUCK.14 5V_BUCK.15 5V_BUCK.16 5V_BUCK.17 5V_BUCK.18 LED27.1 LED27.2 U1.46 U2.A1 U2.A2 U2.A4 U2.A5 U2.A9 U2.A12 U2.A13 U2.B1 U2.B4 U2.B5 U2.B10 U2.B12 U2.B13 U2.C3 U2.C4 U2.C5 U2.C7 U2.C9 U2.C11 U2.D4 U2.D5 U2.D6 U2.D7 U2.D9 U2.D10 U2.D11 U2.D13 U2.E1 U2.E2 U2.E4 U2.E5 U2.E6 U2.E9 U2.E12 U2.E13 U2.F3 U2.F4 U2.F5 U2.F6 U2.F7 U2.F8 U2.F9 U2.F11 U2.G1 U2.G2 U2.G3 U2.G4 U2.G5 U2.G6 U2.G8 U2.G9 U2.G10 U2.G11 U2.G12 U2.G13 U2.H1 U2.H2 U2.H3 U2.H4 U2.H9 U2.H10 U2.H11 U2.H12 U2.H13 U2.J1 U2.J2 U2.J4 U2.J7 U2.J8 U2.K2 U2.K3 U2.K4 U2.K5 U2.K7 U2.K8 U2.K11 U2.L1 U2.L2 U2.L3 U2.L4 U2.L5 U2.L7 U2.L8 U2.L10 U2.L12 U2.L13 U2.M2 U2.M3 U2.M4 U2.M5 U2.M9 U2.N1 U2.N2 U2.N3 U2.N8 U2.N9 U2.N13 U2.P1 U2.P2 U2.P3 U2.P8 U2.P10 U2.P12 U2.P13 U4.1 U4.2 U4.3 U4.6 U4.9 U4.10 U4.11 U4.14 U4.15 U4.16 U4.17 U5.2 U5.3 U5.4 U5.5 U5.6 U5.7 U5.12 U5.14 U5.15 U5.16 U5.17 U5.19 U5.21

## Polygon pours and split planes (outlines as drawn)
GND on Top Layer "GND_L01_P000" (solid, shelved, pour order 0): 91.401,97.757 101.498,87.66 91.465,77.627 81.368,87.724
3V3_MCU on Top Layer "NONET_L01_P004" (solid, remove dead copper, shelved, pour order 4): 69.938,77.818 69.938,77.564 70.827,76.675 71.97,76.675 72.986,77.691 73.24,77.691 74.637,76.294 75.653,77.31 75.653,77.437 72.605,80.485
NetQ2_A_S on Top Layer "NONET_L01_P006" (solid, remove dead copper, shelved, pour order 6): 82.954,40.131 84.83,43.736 85.864,43.226 86.919,42.762 87.993,42.344 90.191,41.651 91.311,41.377 92.441,41.152 93.58,40.977 94.726,40.852 95.876,40.776 97.028,40.751 98.18,40.776 99.33,40.852 100.476,40.977 101.615,41.152 102.745,41.377 103.865,41.651 105.048,37.235 103.625,37.409 102.321,37.15 101.006,36.948 99.685,36.803 98.358,36.716 97.028,36.687 95.698,36.716 94.371,36.803 93.05,36.948 91.735,37.15 90.431,37.409 89.139,37.726 87.862,38.098 86.603,38.525 85.364,39.007 84.147,39.543
NetQ2_B_S on Top Layer "NONET_L01_P008" (solid, remove dead copper, shelved, pour order 8): 107.465,38.612 106.243,42.488 107.335,42.858 108.409,43.276 109.464,43.74 111.508,44.804 112.493,45.402 113.451,46.043 114.381,46.724 115.28,47.446 116.146,48.205 116.979,49.002 117.776,49.835 118.536,50.702 119.257,51.6 119.939,52.53 120.579,53.488 121.177,54.473 125.136,52.187 124.006,51.305 123.268,50.199 122.481,49.126 121.649,48.089 120.772,47.089 119.852,46.129 118.892,45.209 117.892,44.332 116.855,43.5 115.782,42.714 114.677,41.975 113.54,41.285 112.374,40.645 111.181,40.057 109.964,39.522 108.725,39.04
NetQ2_C_S on Top Layer "NONET_L01_P010" (solid, remove dead copper, shelved, pour order 10): 124.092,54.356 120.487,56.232 120.997,57.266 121.461,58.321 121.878,59.395 122.571,61.593 122.845,62.713 123.07,63.843 123.246,64.982 123.371,66.128 123.446,67.278 123.472,68.43 123.446,69.582 123.371,70.732 123.246,71.878 123.07,73.017 122.845,74.148 122.571,75.267 126.988,76.45 126.813,75.027 127.072,73.723 127.275,72.408 127.42,71.087 127.507,69.76 127.536,68.43 127.507,67.101 127.42,65.774 127.275,64.452 127.072,63.137 126.813,61.833 126.497,60.541 126.125,59.265 125.697,58.005 125.215,56.766 124.68,55.549
NetC_1 on Top Layer "NONET_L01_P012" (solid, remove dead copper, shelved, pour order 12): 110.13,46.602 113.502,49.189 116.373,52.323 118.657,55.908 110.095,60.365 105.478,55.099 106.68,50.449
3V3_MCU on L2 "VDD_3V3_L01_P002" (solid, shelved, pour order 2): 88.925,94.264 95.465,87.724 89.324,81.582 82.783,88.123

## Text inside footprints (layer, text, board x,y; h text height)
U5: Top Overlay "X" at 97.35,66.604 h0.26; Top Overlay "Z" at 96.175,66.204 h0.26; Top Overlay "Y" at 96.275,67.754 h0.26